# EAGLE board board (EAGLE 8.6.0)
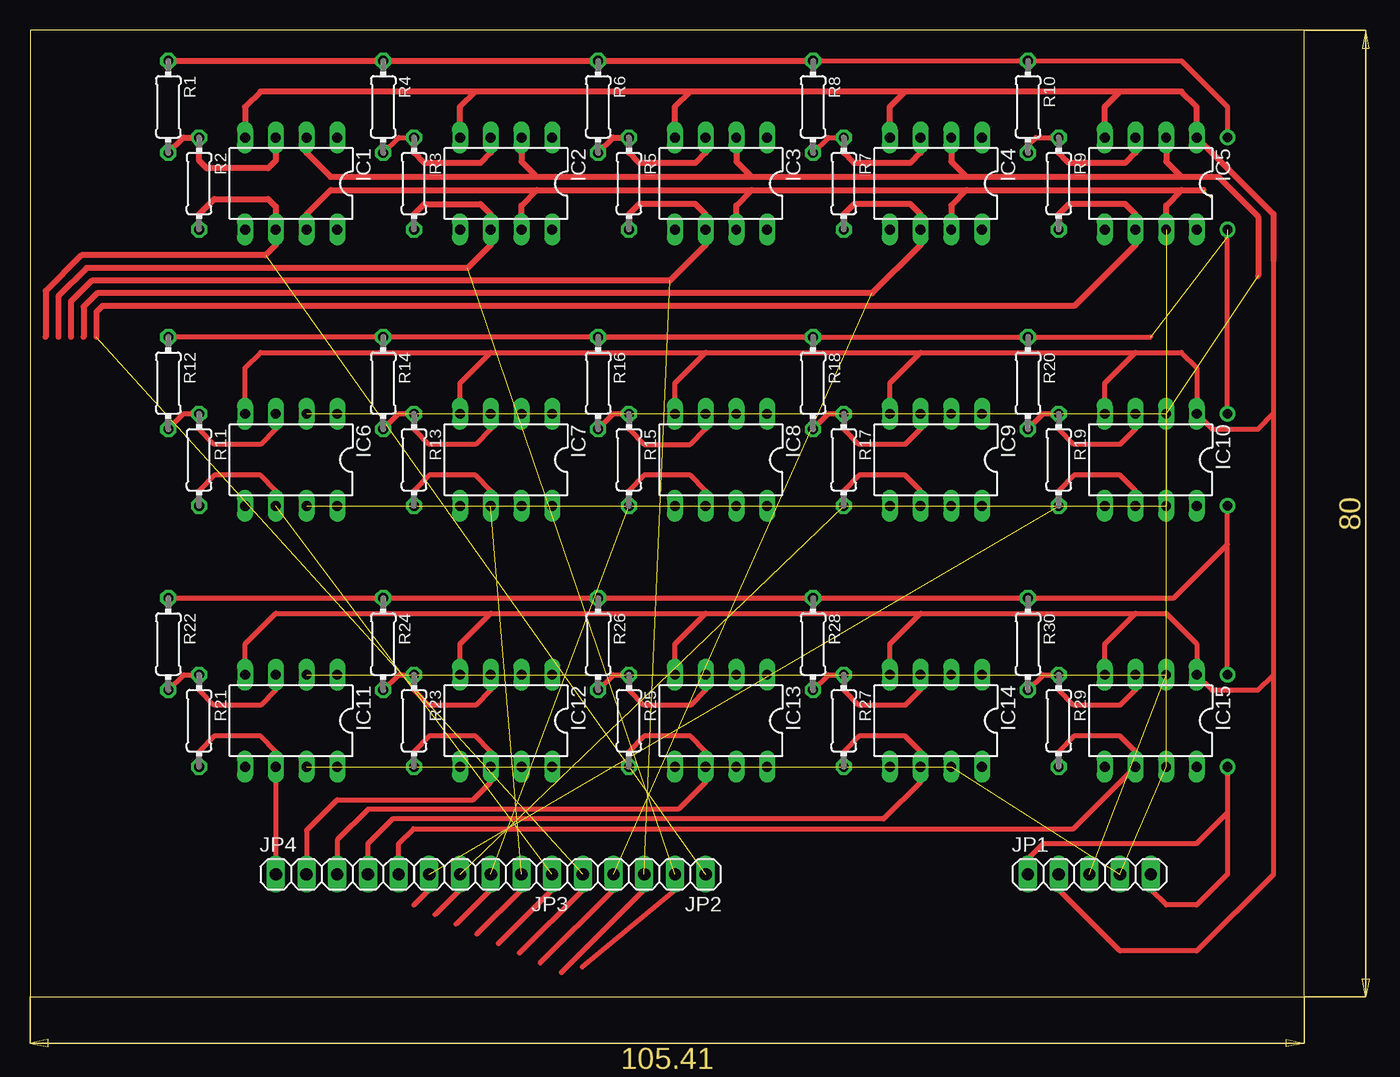
[diagram p0: board, top side]
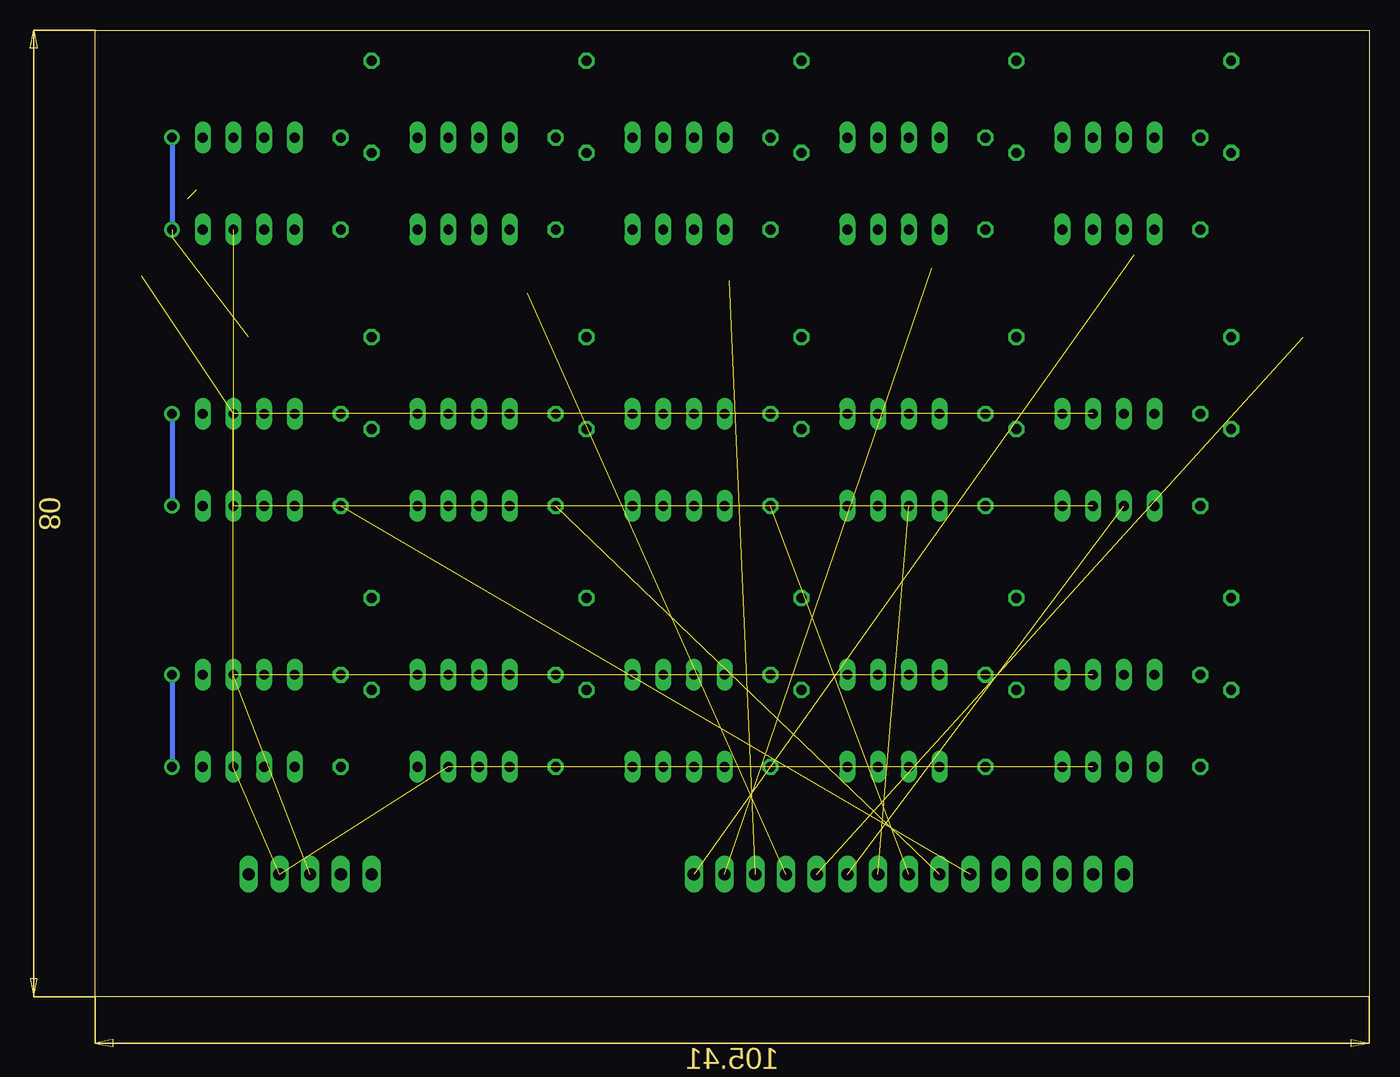
[diagram p1: board, bottom side, seen from below]

Size 105.41 x 80 mm. Coordinates in mm from the lower left corner, seen from the top.
Outline: 0,0 105.41,0 105.41,80 0,80 0,0
Copper layers (1*16): Top 0.035mm / dielectric 1.5mm / Bottom 0.035mm
Design rules "default *": minimum track width 6mil, minimum drill 0.35mm, track to track 0.55mm, track to pad 0.55mm, pad to pad 0.55mm, via to via 0.55mm, smd to smd 6mil, copper to edge 40mil, drill to drill 6mil, minimum pad ring 10mil, minimum via ring 8mil, stop-mask expansion 4mil, vias tented up to drill 0mil, thermal gap 10mil

## Footprints (pad centres in the part's own frame; a part is rotated, then mirrored left to right if it is on the bottom)
DIL08 = drill 0.813 long: 1 -3.81,-3.81; 2 -1.27,-3.81; 3 1.27,-3.81; 4 3.81,-3.81; 5 3.81,3.81; 6 1.27,3.81; 7 -1.27,3.81; 8 -3.81,3.81
1X05 = drill 1.016 long: 1 -5.08,0; 2 -2.54,0; 3 0,0; 4 2.54,0; 5 5.08,0
0204/7 = drill 0.813 octagon: 1 -3.81,0; 2 3.81,0

## Placement (x,y rotation side)
IC1  LM741P  [DIL08]  21.59,67.31 180 top
IC2  LM741P  [DIL08]  39.37,67.31 180 top
IC3  LM741P  [DIL08]  57.15,67.31 180 top
IC4  LM741P  [DIL08]  74.93,67.31 180 top
IC5  LM741P  [DIL08]  92.71,67.31 180 top
IC6  LM741P  [DIL08]  21.59,44.45 180 top
IC7  LM741P  [DIL08]  39.37,44.45 180 top
IC8  LM741P  [DIL08]  57.15,44.45 180 top
IC9  LM741P  [DIL08]  74.93,44.45 180 top
IC10  LM741P  [DIL08]  92.71,44.45 180 top
IC11  LM741P  [DIL08]  21.59,22.86 180 top
IC12  LM741P  [DIL08]  39.37,22.86 180 top
IC13  LM741P  [DIL08]  57.15,22.86 180 top
IC14  LM741P  [DIL08]  74.93,22.86 180 top
IC15  LM741P  [DIL08]  92.71,22.86 180 top
JP1  1  [1X05]  87.63,10.16 0 top
JP2  2  [1X05]  50.8,10.16 180 top
JP3  3  [1X05]  38.1,10.16 180 top
JP4  4  [1X05]  25.4,10.16 0 top
R1  100K  [0204/7]  11.43,73.66 270 top
R2  470K  [0204/7]  13.97,67.31 270 top
R3  470K  [0204/7]  31.75,67.31 270 top
R4  100K  [0204/7]  29.21,73.66 270 top
R5  470K  [0204/7]  49.53,67.31 270 top
R6  100K  [0204/7]  46.99,73.66 270 top
R7  470K  [0204/7]  67.31,67.31 270 top
R8  100K  [0204/7]  64.77,73.66 270 top
R9  470K  [0204/7]  85.09,67.31 270 top
R10  100K  [0204/7]  82.55,73.66 270 top
R11  470K  [0204/7]  13.97,44.45 270 top
R12  100K  [0204/7]  11.43,50.8 270 top
R13  470K  [0204/7]  31.75,44.45 270 top
R14  100K  [0204/7]  29.21,50.8 270 top
R15  470K  [0204/7]  49.53,44.45 270 top
R16  100K  [0204/7]  46.99,50.8 270 top
R17  470K  [0204/7]  67.31,44.45 270 top
R18  100K  [0204/7]  64.77,50.8 270 top
R19  470K  [0204/7]  85.09,44.45 270 top
R20  100K  [0204/7]  82.55,50.8 270 top
R21  470K  [0204/7]  13.97,22.86 270 top
R22  100K  [0204/7]  11.43,29.21 270 top
R23  470K  [0204/7]  31.75,22.86 270 top
R24  100K  [0204/7]  29.21,29.21 270 top
R25  470K  [0204/7]  49.53,22.86 270 top
R26  100K  [0204/7]  46.99,29.21 270 top
R27  470K  [0204/7]  67.31,22.86 270 top
R28  100K  [0204/7]  64.77,29.21 270 top
R29  470K  [0204/7]  85.09,22.86 270 top
R30  100K  [0204/7]  82.55,29.21 270 top

## Library data of the parts
IC1-IC15 = linear
JP1-JP4 = pinhead
R1-R30 = eagle-ltspice; SPICEMODEL: NONE; SPICEPREFIX: R

## Nets
1: IC1.6 JP2.1 R2.2
2: IC2.6 JP2.2 R3.2
3: IC3.6 JP2.3 R5.2
4: IC4.6 JP2.4 R7.2
5: IC5.6 JP2.5 R9.2
6: IC6.6 JP3.1 R11.2
7: IC7.6 JP3.2 R13.2
8: IC8.6 JP3.3 R15.2
9: IC9.6 JP3.4 R17.2
10: IC10.6 JP3.5 R19.2
11: IC11.6 JP4.1 R21.2
12: IC12.6 JP4.2 R23.2
13: IC13.6 JP4.3 R25.2
14: IC14.6 JP4.4 R27.2
15: IC15.6 JP4.5 R29.2
GND: JP1.1 JP1.5 R1.1 R4.1 R6.1 R8.1 R10.1 R12.1 R14.1 R16.1 R18.1 R20.1 R22.1 R24.1 R26.1 R28.1 R30.1
N$1: IC2.3 R3.1 R4.2
N$2: IC1.3 R1.2 R2.1
N$3: IC3.3 R5.1 R6.2
N$4: IC4.3 R7.1 R8.2
N$5: IC5.3 R9.1 R10.2
N$6: IC6.3 R11.1 R12.2
N$7: IC7.3 R13.1 R14.2
N$8: IC8.3 R15.1 R16.2
N$9: IC9.3 R17.1 R18.2
N$10: IC10.3 R19.1 R20.2
N$11: IC11.3 R21.1 R22.2
N$12: IC12.3 R23.1 R24.2
N$13: IC13.3 R25.1 R26.2
N$14: IC14.3 R27.1 R28.2
N$15: IC15.3 R29.1 R30.2
SYG: IC1.2 IC2.2 IC3.2 IC4.2 IC5.2 IC6.2 IC7.2 IC8.2 IC9.2 IC10.2 IC11.2 IC12.2 IC13.2 IC14.2 IC15.2 JP1.3
V+: IC1.7 IC2.7 IC3.7 IC4.7 IC5.7 IC6.7 IC7.7 IC8.7 IC9.7 IC10.7 IC11.7 IC12.7 IC13.7 IC14.7 IC15.7 JP1.4
V-: IC1.4 IC2.4 IC3.4 IC4.4 IC5.1 IC5.4 IC6.4 IC7.4 IC8.4 IC9.4 IC10.1 IC10.4 IC11.4 IC12.4 IC13.4 IC14.4 IC15.1 IC15.4 JP1.2

## Tracks (layer width: path | path; a pad name or v marks a point on that pad's centre or on a via)
1  (1 unrouted)
  Top 0.5: R2.2 13.97,64.77 15.24,66.04 19.68,66.04 20.32,65.41 IC1.6 20.32,62.23 19.47,61.38 4.23,61.38 1.27,58.42 1.27,54.61
2  (1 unrouted)
  Top 0.4: JP2.2 53.34,8.89 45.67,2.49
  Top 0.5: R3.2 31.75,64.77 32.6,65.62 37.25,65.62 38.1,64.77 IC2.6 38.1,62.23 36.2,60.33 4.66,60.33 2.32,57.98 2.32,54.61
3  (1 unrouted)
  Top 0.4: 55.88,62.23 IC3.6 55.78,63.5 | JP2.3 50.8,8.89 43.93,2.02
  Top 0.5: R5.2 49.53,64.77 50.38,65.62 55.03,65.62 55.88,64.77 IC3.6 | 55.88,62.23 52.93,59.28 5.1,59.28 3.37,57.55 3.37,54.61
4  (1 unrouted)
  Top 0.4: JP2.4 48.26,8.89 42.19,2.82
  Top 0.5: R7.2 67.31,64.77 68.16,65.62 72.81,65.62 73.66,64.77 IC4.6 73.66,62.23 69.66,58.23 5.53,58.23 4.42,57.12 4.42,54.61
5  (1 unrouted)
  Top 0.4: JP2.5 45.72,8.89 40.45,3.62
  Top 0.5: R9.2 85.09,64.77 85.94,65.62 90.59,65.62 91.44,64.77 IC5.6 91.44,62.23 86.39,57.18 5.97,57.18 5.47,56.68 5.47,54.61
6  (1 unrouted)
  Top 0.4: IC6.6 20.32,41.91 19.05,43.18 15.24,43.18 13.97,41.91 R11.2 | JP3.1 43.18,8.89 38.71,4.42
7  (1 unrouted)
  Top 0.4: IC7.6 38.1,41.91 36.83,43.18 33.02,43.18 31.75,41.91 R13.2 | JP3.2 40.64,8.89 36.97,5.22
8  (1 unrouted)
  Top 0.4: IC8.6 55.88,41.91 54.61,43.18 50.8,43.18 49.53,41.91 R15.2 | JP3.3 38.1,8.89 35.23,6.02
9  (1 unrouted)
  Top 0.4: IC9.6 73.66,41.91 72.39,43.18 68.58,43.18 67.31,41.91 R17.2 | JP3.4 35.56,8.89 33.49,6.82
10  (1 unrouted)
  Top 0.4: IC10.6 91.44,41.91 90.17,43.18 86.36,43.18 85.09,41.91 R19.2 | 31.75,7.62 33.02,8.89 JP3.5
11
  Top 0.4: R21.2 13.97,20.32 15.24,21.59 19.05,21.59 20.32,20.32 IC11.6 JP4.1
12
  Top 0.4: R23.2 31.75,20.32 33.02,21.59 36.83,21.59 38.1,20.32 IC12.6 38.1,17.78 36.65,16.33 25.4,16.33 22.86,13.79 JP4.2
13
  Top 0.4: R25.2 49.53,20.32 50.8,21.59 54.61,21.59 55.88,20.32 IC13.6 55.88,17.78 53.63,15.53 27.94,15.53 25.4,12.99 JP4.3
14
  Top 0.4: R27.2 67.31,20.32 68.58,21.59 72.39,21.59 73.66,20.32 IC14.6 73.66,17.78 70.61,14.73 29.97,14.73 27.94,12.7 JP4.4
15
  Top 0.4: R29.2 85.09,20.32 86.36,21.59 90.17,21.59 91.44,20.32 IC15.6 86.32,13.93 31.71,13.93 30.48,12.7 JP4.5
GND  (via drill 0.8 pad 1.3)  (2 unrouted)
  Top 0.4: R8.1 R10.1 95.25,77.47 99.06,73.66 v99.06,71.12 | 99.06,37.47 v99.06,40.64 | v99.06,48.26 v99.06,63.5 | 99.06,37.47 94.61,33.02 R30.1 R28.1 R26.1 | JP1.5 92.71,8.89 93.98,7.62 96.52,7.62 99.06,10.16 99.06,15.24 | v99.06,19.05 99.06,15.24 | JP1.1 82.55,11.43 83.82,12.7 96.52,12.7 99.06,15.24 | R22.1 R26.1 | 92.71,54.61 R20.1 R18.1 | R18.1 R14.1 | R14.1 R12.1 | R18.1 R16.1 R14.1 | v99.06,26.67 99.06,37.47 | R24.1 R26.1
  Top 0.5: R1.1 R4.1 R6.1 R8.1
  Bottom 0.4: v99.06,48.26 v99.06,40.64 | v99.06,26.67 v99.06,19.05 | v99.06,71.12 v99.06,63.5
N$1
  Top 0.4: R4.2 30.48,71.12 R3.1
  Top 0.5: R3.1 31.75,69.85 32.6,69 37.25,69 38.1,69.85 IC2.3
N$2
  Top 0.5: IC1.3 20.32,69.22 19.68,68.58 14.61,68.58 13.97,69.22 R2.1 12.7,71.12 R1.2
N$3
  Top 0.5: R6.2 48.26,71.12 R5.1 49.53,69.85 50.38,69 55.03,69 55.88,69.85 IC3.3
N$4
  Top 0.4: R8.2 66.04,71.12 R7.1 | 73.66,69.85 IC4.3
  Top 0.5: R7.1 67.31,69.85 68.16,69 72.81,69 73.66,69.85
N$5
  Top 0.4: R10.2 82.55,70.48 83.19,71.12 R9.1
  Top 0.5: IC5.3 91.44,69.85 90.59,69 85.94,69 85.89,69.05 85.72,69.22 85.09,69.85 R9.1
N$6
  Top 0.4: R12.2 12.7,48.26 R11.1 13.97,46.99 15.24,45.72 19.05,45.72 20.32,46.99 IC6.3
N$7
  Top 0.4: R14.2 30.48,48.26 R13.1 31.75,46.99 33.02,45.72 36.83,45.72 38.1,46.99 IC7.3
N$8
  Top 0.4: IC8.3 55.88,46.99 54.61,45.72 50.8,45.72 49.53,46.99 R15.1 48.26,48.26 R16.2
N$9
  Top 0.4: R18.2 66.04,48.26 R17.1 67.31,46.99 68.58,45.72 72.39,45.72 73.66,46.99 IC9.3
N$10
  Top 0.4: R20.2 83.82,48.26 R19.1 85.09,46.99 86.36,45.72 90.17,45.72 91.44,46.99 IC10.3
N$11
  Top 0.4: R22.2 12.7,26.67 R21.1 13.97,25.4 15.24,24.13 19.05,24.13 20.32,25.4 IC11.3
N$12
  Top 0.4: R24.2 30.48,26.67 R23.1 31.75,25.4 33.02,24.13 36.83,24.13 38.1,25.4 IC12.3
N$13
  Top 0.4: R26.2 48.26,26.67 R25.1 49.53,25.4 50.8,24.13 54.61,24.13 55.88,25.4 IC13.3
N$14
  Top 0.4: R28.2 66.04,26.67 R27.1 67.31,25.4 68.58,24.13 72.39,24.13 73.66,25.4 IC14.3
N$15
  Top 0.4: R30.2 83.82,26.67 R29.1 85.09,25.4 86.36,24.13 90.17,24.13 91.44,25.4 IC15.3
SYG  (11 unrouted)
  Top 0.5: IC1.2 22.86,69.85 24.84,67.87 41.91,67.87 | 41.91,67.87 59.69,67.87 | 59.69,67.87 77.47,67.87 | 77.47,67.87 95.25,67.87 | 95.25,67.87 98.28,67.87 101.6,64.56 101.6,59.69 | 40.64,69.85 IC2.2 40.64,69.14 41.91,67.87 | IC3.2 58.42,69.14 59.69,67.87 | 77.47,67.87 76.2,69.14 IC4.2 | 95.25,67.87 93.98,69.14 IC5.2
V+  (13 unrouted)
  Top 0.4: IC11.7 22.76,19.05
  Top 0.5: IC1.7 22.86,64.77 24.86,66.77 41.91,66.77 | 41.91,66.77 59.69,66.77 | 40.64,64.77 IC2.7 40.64,65.5 41.91,66.77 | 59.69,66.77 58.42,65.5 IC3.7 | 59.69,66.77 77.47,66.77 | 77.47,66.77 95.25,66.77 | 95.25,66.77 97.06,66.77 | 77.47,66.77 76.2,65.5 IC4.7 | 95.25,66.77 93.98,65.5 IC5.7
V-
  Top 0.4: IC3.4 53.34,73.03 | IC6.4 17.78,52.07 19.05,53.34 38.1,53.34 | 38.1,53.34 55.88,53.34 | 55.88,53.34 73.66,53.34 | 73.66,53.34 91.44,53.34 | 91.44,53.34 95.25,53.34 96.52,52.07 IC10.1 97.79,46.99 101.6,46.99 101.6,47.01 102.85,48.26 | IC10.4 88.9,50.8 91.44,53.34 | IC9.4 71.12,50.8 73.66,53.34 | IC8.4 53.34,50.8 55.88,53.34 | IC7.4 35.56,50.8 38.1,53.34 | 38.1,31.75 20.32,31.75 17.78,29.21 IC11.4 | 38.1,31.75 55.88,31.75 | 55.88,31.75 73.66,31.75 | 73.66,31.75 91.44,31.75 | 91.44,31.75 93.98,31.75 96.52,29.21 IC15.1 97.79,25.4 101.58,25.4 102.85,26.67 | IC12.4 35.56,29.21 38.1,31.75 | IC13.4 53.34,29.21 55.88,31.75 | IC14.4 71.12,29.21 73.66,31.75 | IC15.4 88.9,29.21 91.44,31.75 | JP1.2 85.09,8.89 90.17,3.81 96.52,3.81 102.87,10.16 102.85,10.18 102.85,26.67 | 102.85,60.96 102.85,48.26 | 102.85,48.26 102.85,26.67
  Top 0.5: IC1.4 17.78,73.66 19.05,74.93 36.83,74.93 | 90.17,74.93 95.25,74.93 96.52,73.66 IC5.1 102.85,64.79 102.85,60.96 | 90.17,74.93 72.39,74.93 | 72.39,74.93 54.61,74.93 | 54.61,74.93 36.83,74.93 | 36.83,74.93 35.56,73.66 IC2.4 | IC3.4 53.34,73.66 54.61,74.93 | IC4.4 71.12,73.66 72.39,74.93 | IC5.4 88.9,73.66 90.17,74.93